# Altium PCB AD8065_PCB.PcbDoc
Units mm, origin at the board's own origin, x right, y up, seen from the top; angles counter-clockwise.
Board outline 51.88 x 41.32 mm, 2 copper layers (Top Layer, Bottom Layer); 33 components, 26 nets, 88 pads, 1 vias.
Unrouted connection lines stored in the file: 73.
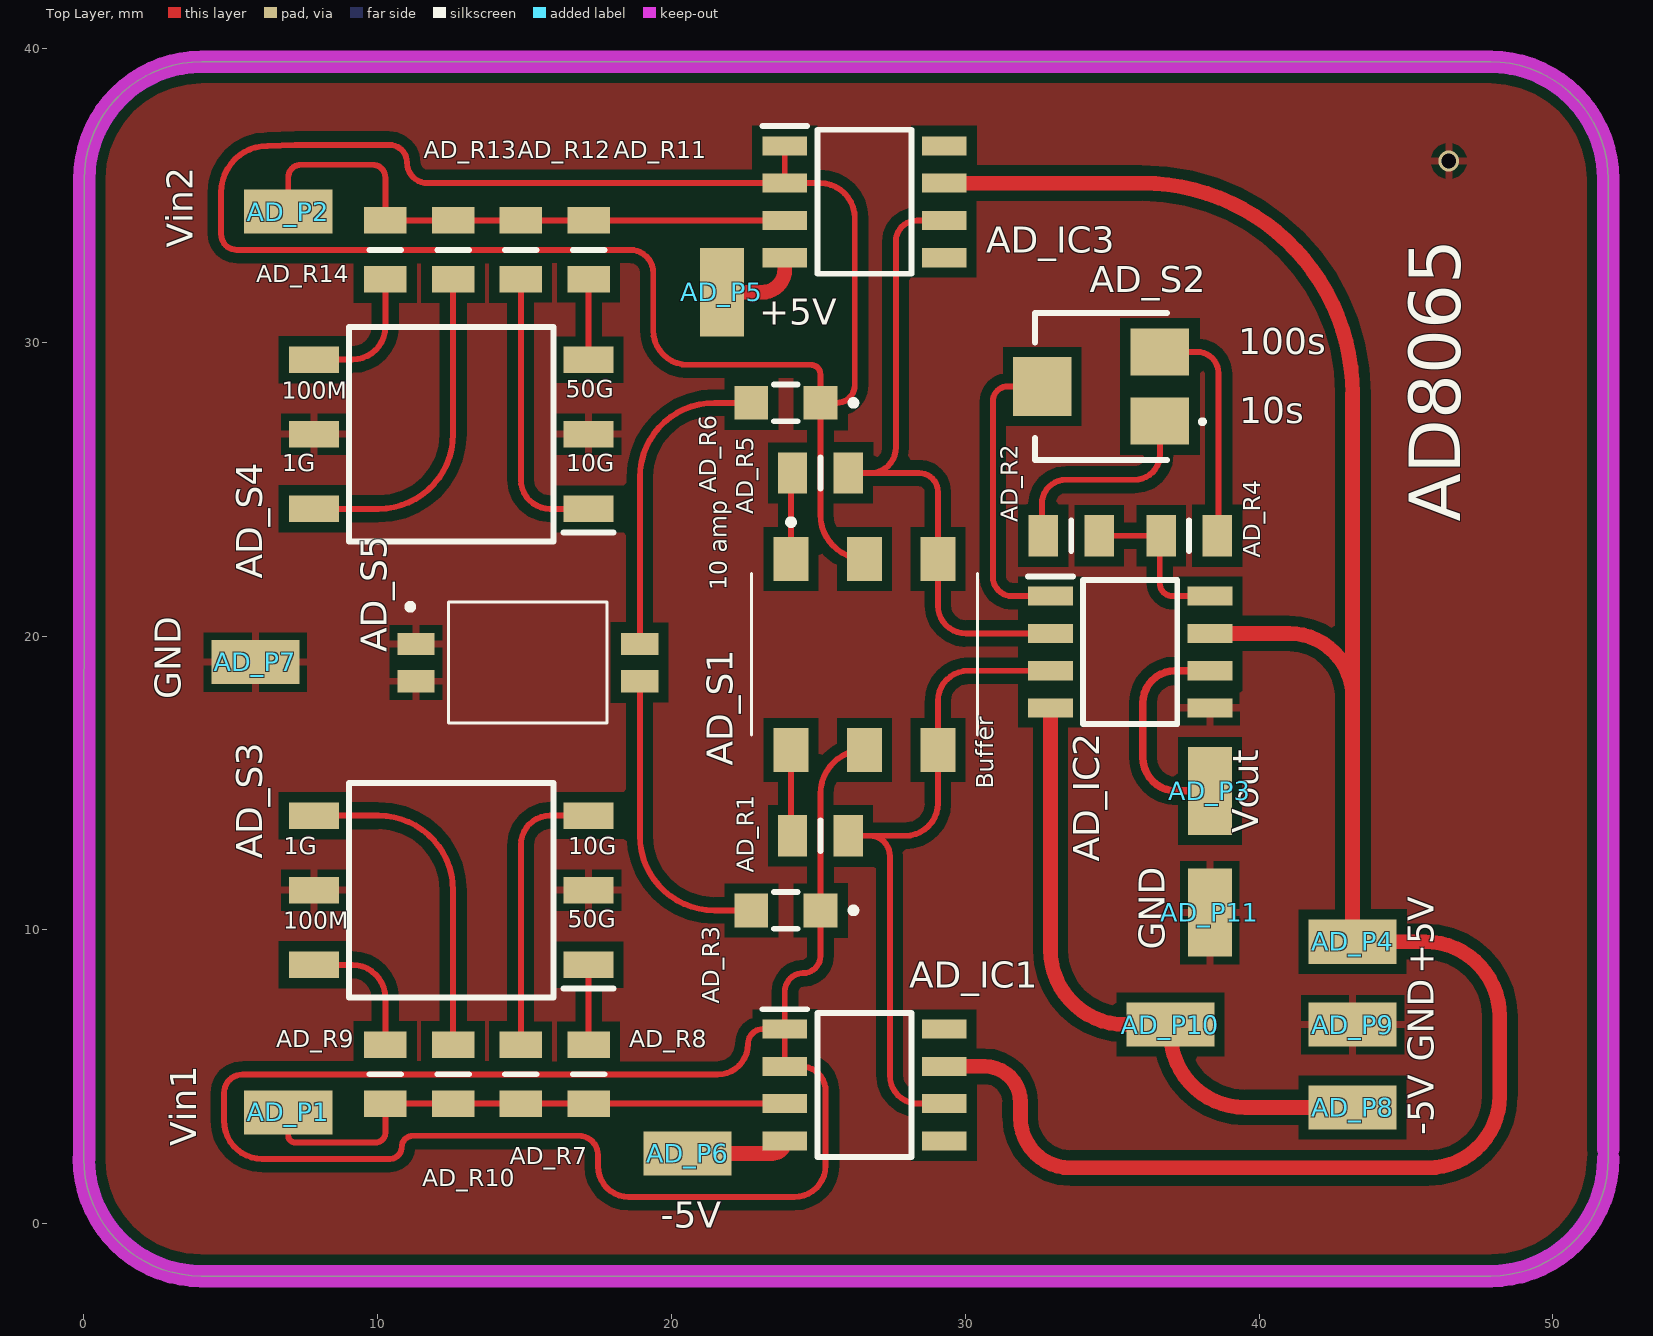
[diagram p0: Top Layer view]
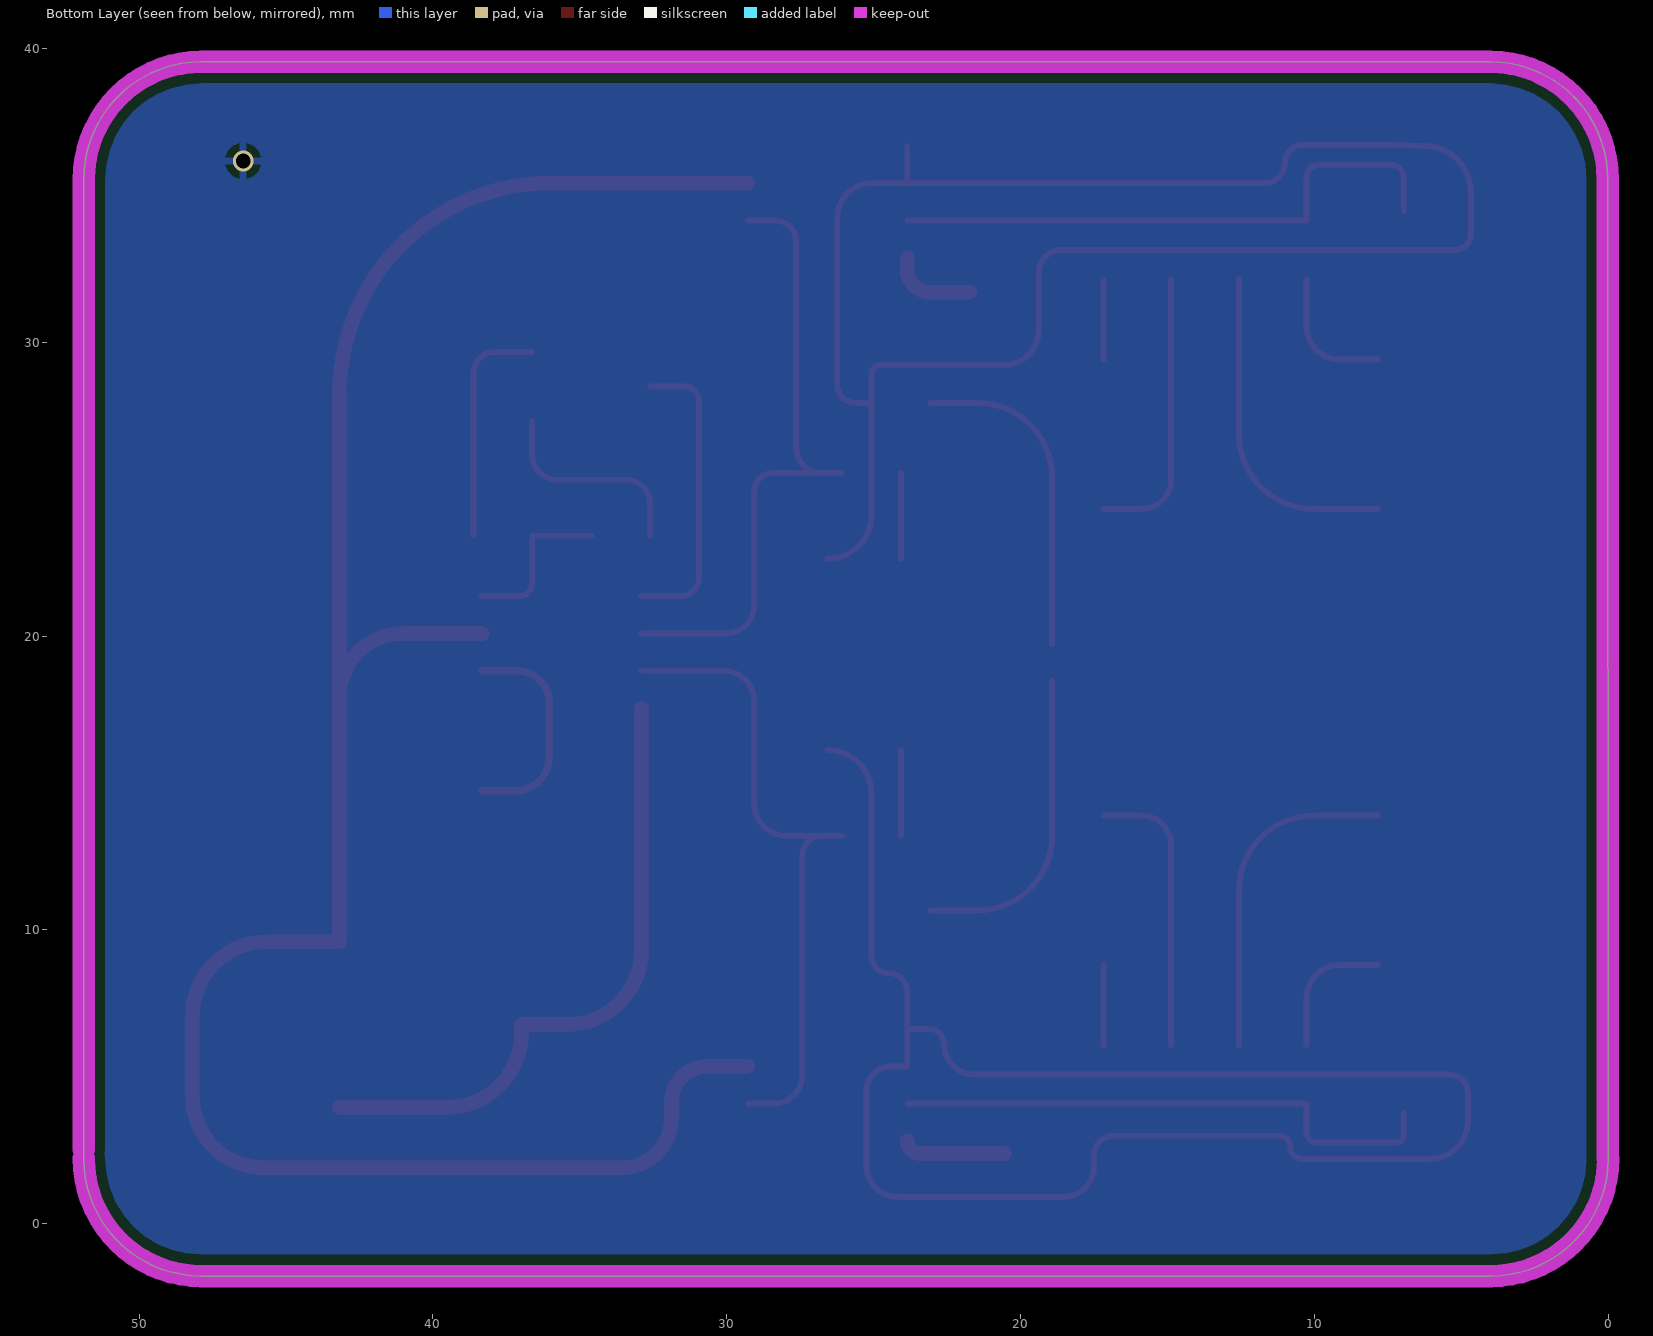
[diagram p1: Bottom Layer view, seen from below]

## Layer stack, top to bottom
Top Solder: solder mask 0.0102, Solder Resist, Dk 3.5
Top Layer: signal copper 0.0356
Dielectric 1: dielectric 0.32, FR-4, Dk 4.8
Bottom Layer: signal copper 0.0356
Bottom Solder: solder mask 0.0102, Solder Resist, Dk 3.5

## Board outline
0,2.222 ccw(c4,2.222) 4,-1.778 47.879,-1.778 ccw(c47.879,2.222) 51.879,2.222 51.879,2.54 51.879,35.547 ccw(c47.879,35.547) 47.879,39.547 4.013,39.547 ccw(c4.013,35.547) 0.013,35.547

## Design rules (kind name [scope] priority, off if disabled: settings)
Clearance [All] p1: gap=0.35 ignorepadtopadclearanceinfootprint=FALSE
PolygonConnect [All] p1: connectstyle=Relief reliefconductorwidth=0.254 reliefentries=4 polygonreliefangle="90 Angle" airgapwidth=0.254
RoutingVias [All] p1: holewidth=0.711 width=1.27 viastyle="Through Hole" minholewidth=0.711 minwidth=1.27 maxholewidth=0.711 maxwidth=1.27
SolderMaskExpansion [All] p1: expansion=0.102 istentingtop=FALSE
Width [All] p1: maxlimit=0.5 minlimit=0.2 preferedwidth=0.2 minimp=50.000000 maximp=50.000000 favimp=50.000000
30 further rules are at their usual default settings.

## Components (designator, comment, footprint, x,y, rotation, side; value= is the part's Value field where it differs from the comment)
AD_IC1 "AD8065ARZ" SOIC127P600X175-8N 26.568,4.724 r0 top
AD_IC2 "LT1920IS8#PBF" SOIC127P599X175-8N 35.611,19.456 r0 top
AD_IC3 "AD8065ARZ" SOIC127P600X175-8N 26.568,34.782 r0 top
AD_P1 "Pad" Pad 8.56,2.926 r90 top
AD_P2 "Pad" Pad 5.359,35.311 r270 top
AD_P3 "Pad" Pad 37.459,13.132 r0 top
AD_P4 "Pad" Pad 41.58,10.465 r270 top
AD_P5 "Pad" Pad 22.581,33.302 r180 top
AD_P6 "Pad" Pad 22.149,1.531 r90 top
AD_P7 "Pad" Pad 4.242,19.982 r270 top
AD_P8 "Pad" Pad 44.78,3.099 r90 top
AD_P9 "Pad" Pad 44.78,5.918 r90 top
AD_P10 "Pad" Pad 38.583,5.918 r90 top
AD_P11 "Pad" Pad 37.459,8.992 r0 top
AD_R1 "CRG0805F270R" RESC2012X65N 25.068,13.208 r0 top
AD_R2 "CRG0805F4K7" RESC2012X65N 33.604,23.419 r0 top
AD_R3 "ERJ-HP6F20R0V" ERJHP6D1000V 23.893,10.668 r180 top
AD_R4 "CRG0805F330R" RESC2012X65N 37.617,23.419 r180 top
AD_R5 "CRG0805F270R" RESC2012X65N 25.068,25.552 r0 top
AD_R6 "ERJ-HP6F20R0V" ERJHP6D1000V 23.893,27.94 r180 top
AD_R7 "RH73X2A10GNTN" RESC2013X50N 14.873,5.089 r90 top
AD_R8 "RH73X2A50GNTN" RESC2013X50N 17.179,5.089 r90 top
AD_R9 "RH73H2A100MKTN" RESC2013X50N 10.262,5.089 r90 top
AD_R10 "RH73W2A1GNTN" RESC2013X50N 12.567,5.089 r90 top
AD_R11 "RH73X2A50GNTN" RESC2013X50N 17.179,33.147 r270 top
AD_R12 "RH73X2A10GNTN" RESC2013X50N 14.873,33.147 r270 top
AD_R13 "RH73W2A1GNTN" RESC2013X50N 12.567,33.147 r270 top
AD_R14 "RH73H2A100MKTN" RESC2013X50N 10.262,33.147 r270 top
AD_S1 "452403012014" 452403012014 26.568,19.38 r0 top
AD_S2 "CS-4-12YA" CS412YA 34.62,28.499 r90 top
AD_S3 "CS-7-14TB" SOP254P1000X405-6N 12.504,11.354 r180 top
AD_S4 "CS-7-14TB" SOP254P1000X405-6N 12.504,26.873 r180 top
AD_S5 "DS05-127-2-02BK-SMT-TR" DS05127202BKSMTTR 15.113,19.101 r270 top

## Footprints (in the part's own frame and the unit in brackets; to place one, negate y for a bottom-side part, rotate by r counter-clockwise, add the part's x,y. Pads: shape width x height; smd on the part's side, far side on the other; paste and mask are expansions set on the pad)
452403012014 [mm]
  rect 1.2x1.5 smd: 1(-2.5,3.25) 2(0,3.25) 3(2.5,3.25) 4(-2.5,-3.25) 5(0,-3.25) 6(2.5,-3.25)
  silkscreen extent -3.85,-2.75 3.85,4.6, body extent -3.85,-2.75 3.85,2.75, height 4.25
CS412YA [mm]
  rect 1.6x2 smd: 1(-1.175,-2) 2(1.175,-2)
  rect 2x2 smd: 3(0,2)
  silkscreen extent -2.5,-3.5 2.5,2.25, body extent -2.5,-2.84 2.5,2.8, height 2.7
DS05127202BKSMTTR [mm]
  rect 0.76x1.27 smd: 1(-0.635,-3.81) 2(-0.635,3.81) 3(0.635,-3.81) 4(0.635,3.81)
  silkscreen extent -2.05,-4.1 2.05,2.7, body extent -2.05,-4.15 2.05,4.15, height 2.4
ERJHP6D1000V [mm]
  rect 1.15x1.15 smd: 1(-1.175,0) 2(1.175,0)
  silkscreen extent -2.4,-0.63 0.4,0.63, body extent -1,-0.63 1,0.63, height 0.7
Pad [mm]
  rect 1.5x3 smd: 0(0.864,1.6)
RESC2012X65N [mm]
  rect 1x1.4 smd: 1(-0.95,0) 2(0.95,0)
  silkscreen extent 0,-0.53 0,0.53
RESC2013X50N [mm]
  rect 0.9x1.45 smd: 1(-1,0) 2(1,0)
  silkscreen extent 0,-0.54 0,0.54
SOIC127P599X175-8N [mm]
  rect 1.526x0.65 smd: 1(-2.712,1.905) 2(-2.712,0.635) 3(-2.712,-0.635) 4(-2.712,-1.905) 5(2.712,-1.905) 6(2.712,-0.635) 7(2.712,0.635) 8(2.712,1.905)
  silkscreen extent -3.47,-2.45 1.6,2.58, body extent -3,-2.45 3,2.45, height 1.75
SOIC127P600X175-8N [mm]
  rect 1.525x0.65 smd: 1(-2.712,1.905) 2(-2.712,0.635) 3(-2.712,-0.635) 4(-2.712,-1.905) 5(2.712,-1.905) 6(2.712,-0.635) 7(2.712,0.635) 8(2.712,1.905)
  silkscreen extent -3.47,-2.45 1.6,2.58, body extent -3,-2.45 3,2.45, height 1.75
SOP254P1000X405-6N [mm]
  rect 1.7x0.9 smd: 1(-4.675,2.54) 2(-4.675,0) 3(-4.675,-2.54) 4(4.675,-2.54) 5(4.675,0) 6(4.675,2.54)
  silkscreen extent -5.53,-3.65 3.47,3.65, body extent -4.98,-3.57 4.82,3.63, height 2.93

## Part data
AD_IC1 AD_IC3: "Integrated Circuit", Case=SOIC-8, Manufacturer_Name="Analog Devices", Mouser Part Number=584-AD8065ARZ, Arrow Part Number=AD8065ARZ, Arrow Price/Stock=https://www.arrow.com/en/products/ad8065arz/analog-devices?region=nac, Datasheet Link=https://datasheet.datasheetarchive.com/originals/distributors/Datasheets-1/DSA-2047.pdf, Height=1.75mm, Manufacturer_Part_Number=AD8065ARZ, Mounting Style=SMD/SMT, Mouser Price/Stock=https://www.mouser.co.uk/ProductDetail/Analog-Devices/AD8065ARZ?qs=%2FtpEQrCGXCyXd34RglYLzQ%3D%3D
AD_IC2: "Integrated Circuit", Case=SOIC-8, Manufacturer_Name="Analog Devices", Mouser Part Number=584-LT1920IS8#PBF, Arrow Part Number=LT1920IS8#PBF, Arrow Price/Stock=https://www.arrow.com/en/products/lt1920is8pbf/analog-devices?region=nac, Datasheet Link=https://datasheet.datasheetarchive.com/originals/distributors/SFDatasheet-4/sf-00091026.pdf, Height=1.752mm, Manufacturer_Part_Number=LT1920IS8#PBF, Mounting Style=SMD/SMT, Mouser Price/Stock=https://www.mouser.co.uk/ProductDetail/Analog-Devices/LT1920IS8PBF?qs=ytflclh7QUWOSod6PqfjSg%3D%3D
AD_R1 AD_R5: "Resistor 270", Case="0805 (in)", Manufacturer_Name="TE Connectivity", Mouser Part Number=279-CRG0805F270R, Arrow Part Number=CRG0805F270R, Arrow Price/Stock=https://www.arrow.com/en/products/crg0805f270r/te-connectivity, Datasheet Link=http://www.te.com/commerce/DocumentDelivery/DDEController?Action=showdoc&DocId=Customer+Drawing%7F1623109%7FBA%7Fpdf%7FEnglish%7FENG_CD_1623109_BA.pdf%7F1623109-1, Height=0.65mm, Manufacturer_Part_Number=CRG0805F270R, Mounting Style=SMD/SMT, Mouser Price/Stock=https://www.mouser.com/Search/Refine.aspx?Keyword=279-CRG0805F270R
AD_R2: "Resistor 4.7k", Case="0805 (in)", Manufacturer_Name="TE Connectivity", Mouser Part Number=279-CRG0805F4K7, Arrow Part Number=CRG0805F4K7, Arrow Price/Stock=https://www.arrow.com/en/products/crg0805f4k7/te-connectivity?region=nac, Datasheet Link=http://www.te.com/commerce/DocumentDelivery/DDEController?Action=showdoc&DocId=Customer+Drawing%7F1623109%7FBA%7Fpdf%7FEnglish%7FENG_CD_1623109_BA.pdf%7F1623109-1, Height=0.65mm, Manufacturer_Part_Number=CRG0805F4K7, Mounting Style=SMD/SMT, Mouser Price/Stock=https://www.mouser.co.uk/ProductDetail/TE-Connectivity-Holsworthy/CRG0805F4K7?qs=VHcS2MTj4gYTCl8bEMP1DQ%3D%3D
AD_R3 AD_R6: "Resistor 20", Manufacturer_Name=Panasonic, Datasheet Link=http://industrial.panasonic.com/cdbs/www-data/pdf/RDQ0000/ast-ind-151033.pdf, Height=0.7mm, Manufacturer_Part_Number=ERJ-HP6F20R0V
AD_R4: "Resistor 330", Case="0805 (in)", Manufacturer_Name="TE Connectivity", Mouser Part Number=279-CRG0805F330R, Arrow Part Number=CRG0805F330R, Arrow Price/Stock=https://www.arrow.com/en/products/crg0805f330r/te-connectivity?region=nac, Datasheet Link=http://www.te.com/commerce/DocumentDelivery/DDEController?Action=showdoc&DocId=Customer+Drawing%7F1623109%7FBA%7Fpdf%7FEnglish%7FENG_CD_1623109_BA.pdf%7F1623109-1, Height=0.65mm, Manufacturer_Part_Number=CRG0805F330R, Mounting Style=SMD/SMT, Mouser Price/Stock=https://www.mouser.co.uk/ProductDetail/TE-Connectivity-Holsworthy/CRG0805F330R?qs=VHcS2MTj4gbLzLJ0%2FI3gmA%3D%3D
AD_R7 AD_R12: "Resistor 10G", Case="0805 (in)", Manufacturer_Name="TE Connectivity", Mouser Part Number=279-RH73X2A10GNTN, Arrow Part Number=RH73X2A10GNTN, Arrow Price/Stock=https://www.arrow.com/en/products/rh73x2a10gntn/te-connectivity?region=nac, Datasheet Link=https://ms.componentsearchengine.com/Datasheets/2/RH73X2A10GNTN.pdf, Height=0.5mm, Manufacturer_Part_Number=RH73X2A10GNTN, Mounting Style=SMD/SMT, Mouser Price/Stock=https://www.mouser.co.uk/ProductDetail/TE-Connectivity-Holsworthy/RH73X2A10GNTN?qs=ip69W3eHERU7YDrLGqSvdQ%3D%3D
AD_R8 AD_R11: "Resistor 50G", Case="0805 (in)", Manufacturer_Name="TE Connectivity", Mouser Part Number=279-RH73X2A50GNTN, Datasheet Link=http://www.te.com/commerce/DocumentDelivery/DDEController?Action=showdoc&DocId=Data+Sheet%7F1773268%7FA%7Fpdf%7FEnglish%7FENG_DS_1773268_A.pdf%7F1625862-4, Height=0.5mm, Manufacturer_Part_Number=RH73X2A50GNTN, Mounting Style=SMD/SMT, Mouser Price/Stock=https://www.mouser.co.uk/ProductDetail/TE-Connectivity-Holsworthy/RH73X2A50GNTN?qs=ip69W3eHERVWqEnkYPnkdA%3D%3D
AD_R9 AD_R14: "Resistor 100M", Case="0805 (in)", Manufacturer_Name="TE Connectivity", Mouser Part Number=279-RH73H2A100MKTN, Arrow Part Number=RH73H2A100MKTN, Arrow Price/Stock=https://www.arrow.com/en/products/rh73h2a100mktn/te-connectivity?region=nac, Datasheet Link=http://www.te.com/commerce/DocumentDelivery/DDEController?Action=showdoc&DocId=Data+Sheet%7F1773268%7FA%7Fpdf%7FEnglish%7FENG_DS_1773268_A.pdf%7F1625856-2, Height=0.5mm, Manufacturer_Part_Number=RH73H2A100MKTN, Mounting Style=SMD/SMT, Mouser Price/Stock=https://www.mouser.co.uk/ProductDetail/TE-Connectivity-Holsworthy/RH73H2A100MKTN?qs=ip69W3eHERW4mrE8f49Fxw%3D%3D
AD_R10 AD_R13: "Resistor 1G", Case="0805 (in)", Manufacturer_Name="TE Connectivity", Mouser Part Number=279-RH73W2A1GNTN, Arrow Part Number=RH73W2A1GNTN, Arrow Price/Stock=https://www.arrow.com/en/products/rh73w2a1gntn/te-connectivity?region=nac, Datasheet Link=https://componentsearchengine.com/Datasheets/2/RH73W2A1GNTN.pdf, Height=0.5mm, Manufacturer_Part_Number=RH73W2A1GNTN, Mounting Style=SMD/SMT, Mouser Price/Stock=https://www.mouser.co.uk/ProductDetail/TE-Connectivity-Holsworthy/RH73W2A1GNTN?qs=ip69W3eHERV4S8tLXHYflA%3D%3D
AD_S1: "Switch", Manufacturer_Name="Wurth Elektronik", Mouser Part Number=710-452403012014, Datasheet Link=https://katalog.we-online.de/em/datasheet/452403012014.pdf, Height=3.3mm, Manufacturer_Part_Number=452403012014, Mouser Price/Stock=https://www.mouser.co.uk/ProductDetail/Wurth-Elektronik/452403012014?qs=DvsTirrhYfOi0QxHyAEO3w%3D%3D
AD_S2: "Switch", Manufacturer_Name="NIDEC COPAL", Datasheet Link=https://www.nidec-copal-electronics.com/j/product/detail/00000197/, Height=2.6mm, Manufacturer_Part_Number=CS-4-12YA, Mounting Style=SMD/SMT
AD_S3 AD_S4: "Switch", Manufacturer_Name="Copal Electronics", Datasheet Link=https://www.nidec-copal-electronics.com/e/catalog/switch/cs-7.pdf, Height=4.05mm, Manufacturer_Part_Number=CS-7-14TB, Mounting Style=SMD/SMT
AD_S5: "Switch", Manufacturer_Name="CUI Devices", Mouser Part Number=490-DS05127202BK-STR, Datasheet Link=https://www.cuidevices.com/product/resource/digikeypdf/ds05-127-smt.pdf, Height=2.6mm, Manufacturer_Part_Number=DS05-127-2-02BK-SMT-TR, Mounting Style=SMD/SMT, Mouser Price/Stock=https://www.mouser.co.uk/ProductDetail/CUI-Devices/DS05-127-2-02BK-SMT-TR?qs=wnTfsH77Xs6TIyf6yhikhg%3D%3D

## Via types
v1: diameter 0.7, hole 0.5, Top Layer to Bottom Layer, 1 vias

## Nets (pads, with @x,y where several pads share a name; then routed paths per layer and width w, separated by ;. In a path a pad name is that pad's centre, name@x,y a point inside that pad or via, vN(x,y) a via of type N, cw(c..) or ccw(c..) an arc to the next point about the centre after c; other vN are vias at no path point)
"1st Res (1)": AD_IC1.1 AD_IC1.2 AD_R3.1 AD_S1.5 | length 61.6
  Top Layer w0.2: AD_S1.5 ccw(c26.568,14.63) 25.068,14.63 25.068,9.117 cw(c24.486,9.117) 24.486,8.534 ccw(c24.486,7.905) 23.856,7.905 AD_IC1.1 ; AD_IC1.1 23.114,6.629 ccw(c23.114,6.121) 22.606,6.121 cw(c21.565,6.121) 21.565,5.08 5.403,5.08 ccw(c5.403,4.449) 4.771,4.449 4.771,3.512 ccw(c6.073,3.512) 6.073,2.21 10.414,2.21 ccw(c10.414,2.616) 10.82,2.616 cw(c11.201,2.616) 11.201,2.997 16.84,2.997 cw(c16.84,2.337) 17.501,2.337 17.501,1.956 ccw(c18.542,1.956) 18.542,0.914 24.181,0.914 ccw(c24.181,1.981) 25.248,1.981 25.248,4.521 ccw(c24.409,4.521) 24.409,5.359 AD_IC1.2 AD_IC1.1
"1st Res (2)": AD_IC3.1 AD_IC3.2 AD_R6.1 AD_S1.2 | length 64.9
  Top Layer w0.2: AD_IC3.1 AD_IC3.2 ; AD_S1.2 cw(c26.568,24.13) 25.068,24.13 AD_R6.1 ; AD_IC3.2 11.7,35.417 cw(c11.7,36.119) 10.998,36.119 ccw(c10.397,36.119) 10.397,36.72 7.189,36.72 6.258,36.687 ccw(c6.258,35.103) 4.674,35.103 4.674,33.68 ccw(c5.207,33.68) 5.207,33.147 18.593,33.147 cw(c18.593,32.36) 19.38,32.36 19.38,30.404 ccw(c20.549,30.404) 20.549,29.235 24.74,29.235 cw(c24.74,28.907) 25.068,28.907 AD_R6.1 ; AD_IC3.2 25.054,35.417 cw(c25.054,34.233) 26.238,34.233 26.238,28.55 cw(c25.629,28.55) 25.629,27.94 AD_R6.1
"2nd Res": AD_IC2.1 AD_S2.3 | length 10.3
  Top Layer w0.2: AD_S2.3 31.445,28.499 ccw(c31.445,27.991) 30.937,27.991 30.937,22.022 ccw(c31.598,22.022) 31.598,21.361 AD_IC2.1
"10 amp (1)": AD_R1.1 AD_S1.4 | length 2.9
  Top Layer w0.2: AD_R1.1@24.068,13.208 AD_S1.4
"10 amp (2)": AD_R5.1 AD_S1.1 | length 2.9
  Top Layer w0.2: AD_S1.1 AD_R5.1@24.068,25.552
"10 amp (2nd)": AD_R2.1 AD_S2.1 | length 7.2
  Top Layer w0.2: AD_R2.1@32.604,23.419 32.604,24.502 cw(c33.426,24.502) 33.426,25.324 35.763,25.324 ccw(c35.763,26.181) 36.62,26.181 AD_S2.1
"100 amp (2nd)": AD_R4.1 AD_S2.2 | length 7.9
  Top Layer w0.2: AD_S2.2 37.89,29.674 cw(c37.89,28.947) 38.617,28.947 AD_R4.1@38.617,23.419
+5V: AD_IC1.7 AD_IC2.7 AD_IC3.7 AD_P4.0 | length 74.4
  Top Layer w0.5: AD_IC1.7 30.658,5.359 cw(c30.658,4.14) 31.877,4.14 31.877,3.607 ccw(c33.579,3.607) 33.579,1.905 45.745,1.905 ccw(c45.745,4.343) 48.184,4.343 48.184,7.061 ccw(c45.644,7.061) 45.644,9.601 AD_P4.0 43.18,17.932 ; AD_IC3.7 36.008,35.417 cw(c36.008,28.245) 43.18,28.245 43.18,17.932 ; AD_IC2.7 41.021,20.091 cw(c41.021,17.932) 43.18,17.932
-5V: AD_IC1.4 AD_IC2.4 AD_IC3.4 AD_P5.0 AD_P6.0 AD_P8.0 AD_P10.0 | length 28.2
  Top Layer w0.5: AD_P6.0 23.431,2.394 ccw(c23.431,2.819) AD_IC1.4 ; AD_P5.0 23.079,31.702 ccw(c23.079,32.48) 23.856,32.48 AD_IC3.4 ; AD_IC2.4 32.899,9.322 ccw(c35.439,9.322) 35.439,6.782 AD_P10.0 36.982,6.502 ccw(c39.522,6.502) 39.522,3.962 AD_P8.0
"Buffer (1)": AD_IC1.6 AD_IC2.3 AD_R1.2 AD_S1.6 | length 22.5
  Top Layer w0.2: AD_R1.2@26.068,13.208 26.746,13.208 ; AD_IC1.6 28.397,4.089 cw(c28.397,5.055) 27.432,5.055 27.432,12.522 ccw(c26.746,12.522) 26.746,13.208 ; AD_IC2.3 30.095,18.821 ccw(c30.095,17.795) 29.068,17.795 29.068,14.311 cw(c27.965,14.311) 27.965,13.208 26.746,13.208
"Buffer (2)": AD_IC2.2 AD_IC3.6 AD_R5.2 AD_S1.3 | length 22
  Top Layer w0.2: AD_R5.2@26.068,25.552 26.772,25.552 ; AD_IC3.6 28.356,34.147 ccw(c28.356,33.426) 27.635,33.426 27.635,26.416 cw(c26.772,26.416) 26.772,25.552 ; AD_IC2.2 30.019,20.091 cw(c30.019,21.042) 29.068,21.042 AD_S1.3 29.068,24.907 ccw(c28.423,24.907) 28.423,25.552 26.772,25.552
GND: AD_IC2.5 AD_P7.0 AD_P9.0 AD_P11.0 AD_S3.2 AD_S3.5 AD_S4.2 AD_S4.5 AD_S5.1 AD_S5.3
  other v1: 46.457,36.17
NetAD_IC2_8: AD_IC2.8 AD_R2.2 AD_R4.2 | length 5.6
  Top Layer w0.2: AD_R2.2@34.604,23.419 36.617,23.419 36.617,21.803 ccw(c37.059,21.803) 37.059,21.361 AD_IC2.8
NetAD_R7_2: AD_R7.2 AD_S3.3 | length 9.7
  Top Layer w0.2: AD_R7.2 14.873,12.892 cw(c15.875,12.892) 15.875,13.894 AD_S3.3
NetAD_R8_2: AD_R8.2 AD_S3.1 | length 2.7
  Top Layer w0.2: AD_R8.2 AD_S3.1
NetAD_R9_2: AD_R9.2 AD_S3.6 | length 4.7
  Top Layer w0.2: AD_S3.6 9.135,8.814 cw(c9.135,7.687) 10.262,7.687 AD_R9.2
NetAD_R10_2: AD_R10.2 AD_S3.4 | length 11.5
  Top Layer w0.2: AD_S3.4 10.027,13.894 cw(c10.027,11.354) 12.567,11.354 AD_R10.2
NetAD_R11_2: AD_R11.2 AD_S4.3 | length 2.7
  Top Layer w0.2: AD_S4.3 AD_R11.2
NetAD_R12_2: AD_R12.2 AD_S4.1 | length 9.7
  Top Layer w0.2: AD_R12.2 14.873,25.33 ccw(c15.87,25.33) 15.87,24.333 AD_S4.1
NetAD_R13_2: AD_R13.2 AD_S4.6 | length 11.5
  Top Layer w0.2: AD_S4.6 10.027,24.333 ccw(c10.027,26.873) 12.567,26.873 AD_R13.2
NetAD_R14_2: AD_R14.2 AD_S4.4 | length 4.7
  Top Layer w0.2: AD_S4.4 9.144,29.413 ccw(c9.144,30.531) 10.262,30.531 AD_R14.2
Rg1: AD_R3.2 AD_S5.4 | length 10.9
  Top Layer w0.2: AD_S5.4 18.923,13.208 ccw(c21.463,13.208) 21.463,10.668 AD_R3.2@23.068,10.668
Rg2: AD_R6.2 AD_S5.2 | length 11.3
  Top Layer w0.2: AD_S5.2 18.923,25.4 cw(c21.463,25.4) 21.463,27.94 AD_R6.2@23.068,27.94
Vin1: AD_IC1.3 AD_P1.0 AD_R7.1 AD_R8.1 AD_R9.1 AD_R10.1 | length 19
  Top Layer w0.2: AD_P1.0 6.96,2.997 ccw(c7.188,2.997) 7.188,2.769 9.931,2.769 ccw(c9.931,3.099) 10.262,3.099 AD_R9.1 AD_R10.1 AD_R7.1 AD_R8.1 AD_IC1.3
Vin2: AD_IC3.3 AD_P2.0 AD_R11.1 AD_R12.1 AD_R13.1 AD_R14.1 | length 20
  Top Layer w0.2: AD_P2.0 6.96,35.611 cw(c7.391,35.611) 7.391,36.043 9.83,36.043 cw(c9.83,35.611) 10.262,35.611 AD_R14.1 AD_R13.1 AD_R12.1 AD_R11.1 AD_IC3.3
Vout: AD_IC2.6 AD_P3.0 | length 7.7
  Top Layer w0.254: AD_P3.0 37.186,14.732 cw(c37.186,15.875) 36.043,15.875 36.043,17.729 cw(c37.135,17.729) 37.135,18.821 AD_IC2.6
pads on no net: AD_IC1.5 AD_IC1.8 AD_IC3.5 AD_IC3.8

## Polygon pours and split planes (outlines as drawn)
GND on Bottom Layer "GND_L02_P001" (solid, pour order 1): 49.352,39.548 cw(c49.352,37.008) 51.892,37.008 51.892,0.762 cw(c49.352,0.762) 49.352,-1.778 2.54,-1.778 cw(c2.54,0.762) 0,0.762 0,37.008 cw(c2.54,37.008) 2.54,39.548 31.877,39.548
GND on Top Layer "GND_L01_P000" (solid, remove dead copper, pour order 0): 49.352,39.573 cw(c49.352,37.033) 51.892,37.033 51.892,0.762 cw(c49.352,0.762) 49.352,-1.778 2.54,-1.778 cw(c2.54,0.762) 0,0.762 0,37.033 cw(c2.54,37.033) 2.54,39.573 42.951,39.573

## Keep-outs
Keep-Out Layer:
  lines w0.762: 0,2.222 ccw(c4,2.222) 4,-1.778 47.879,-1.778 ccw(c47.879,2.222) 51.879,2.222 ; 0.013,2.222 0.013,35.547 cw(c4.013,35.547) 4.013,39.547 47.879,39.547 cw(c47.879,35.547) 51.879,35.547 51.879,2.54

## Silkscreen, mask and mechanical layers (free items; w line width, h text height)
Top Overlay:
  text "Vin2" at 4.013,33.223 h1.52 r90
  text "+5V" at 22.987,30.289 h1.52
  text "100s" at 39.294,29.288 h1.52
  text "50G" at 16.408,27.923 h1
  text "100M" at 6.731,27.872 h1
  text "10s" at 39.319,26.938 h1.52
  text "1G" at 6.753,25.4 h1
  text "10G" at 16.426,25.4 h1
  text "AD8065" at 47.422,23.901 h3 r90
  text "10 amp" at 22.085,21.565 h1 r90
  text "GND" at 3.6,17.847 h1.52 r90
  text "Buffer" at 31.157,14.808 h1 r90
  text "Vout" at 40.272,13.284 h1.52 r90
  text "1G" at 6.808,12.374 h1
  text "10G" at 16.481,12.374 h1
  text "50G" at 16.463,9.893 h1
  text "100M" at 6.786,9.842 h1
  text "GND" at 37.097,9.32 h1.52 r90
  text "+5V" at 46.241,8.498 h1.52 r90
  text "GND" at 46.247,5.51 h1.52 r90
  text "-5V" at 46.241,3.014 h1.52 r90
  text "Vin1" at 4.14,2.642 h1.52 r90
  text "-5V" at 19.634,-0.445 h1.52